# Altium PCB PCB2_0.PcbDoc
Units mm, origin at the board's own origin, x right, y up, seen from the top; angles counter-clockwise.
Board outline 110 x 69 mm, 2 copper layers (Top Layer, Bottom Layer); 64 components, 63 nets, 269 pads, 16 vias.
Unrouted connection lines stored in the file: 122.
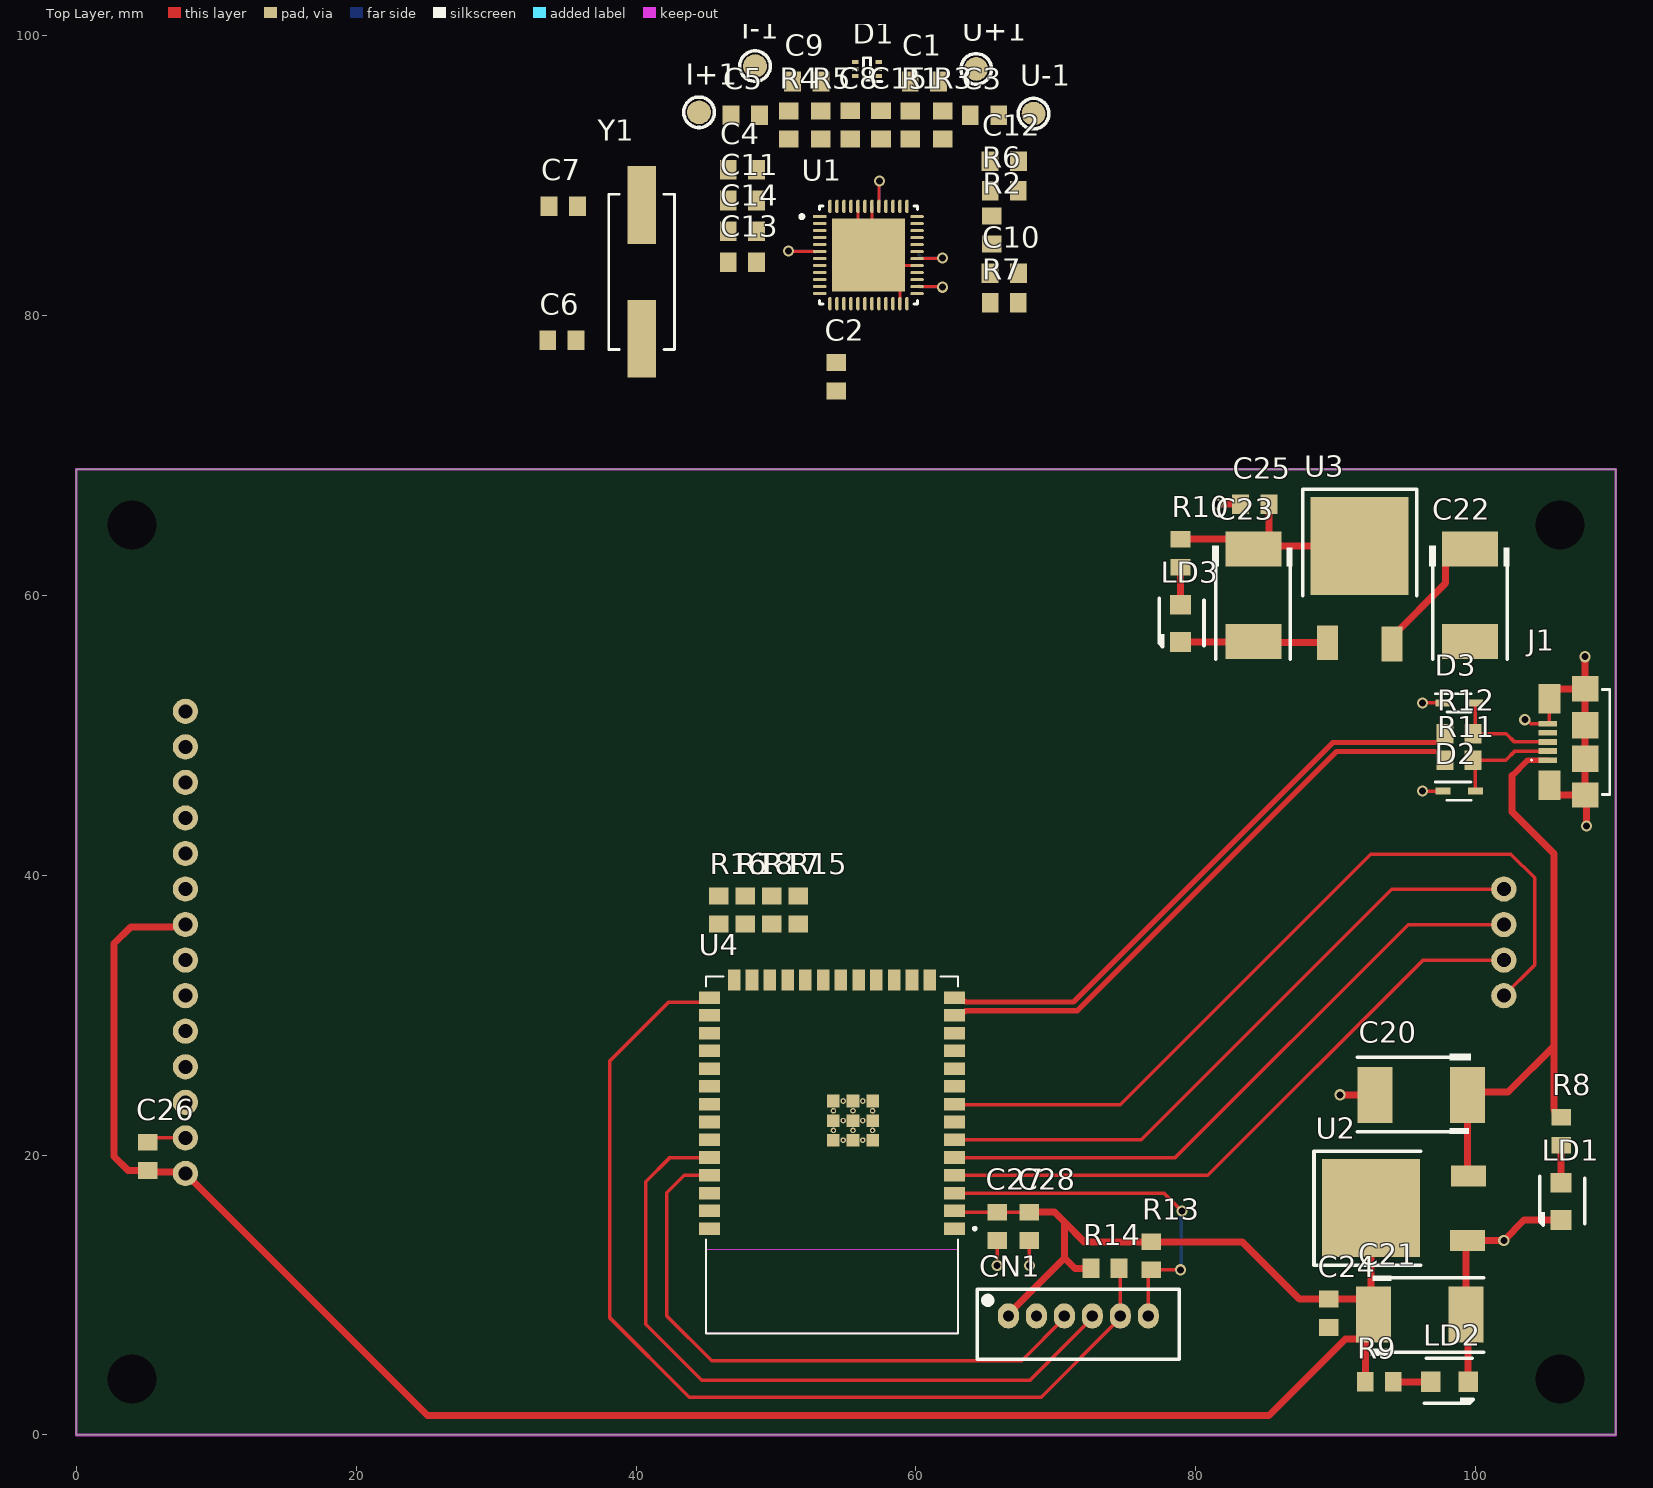
[diagram p0: Top Layer view]
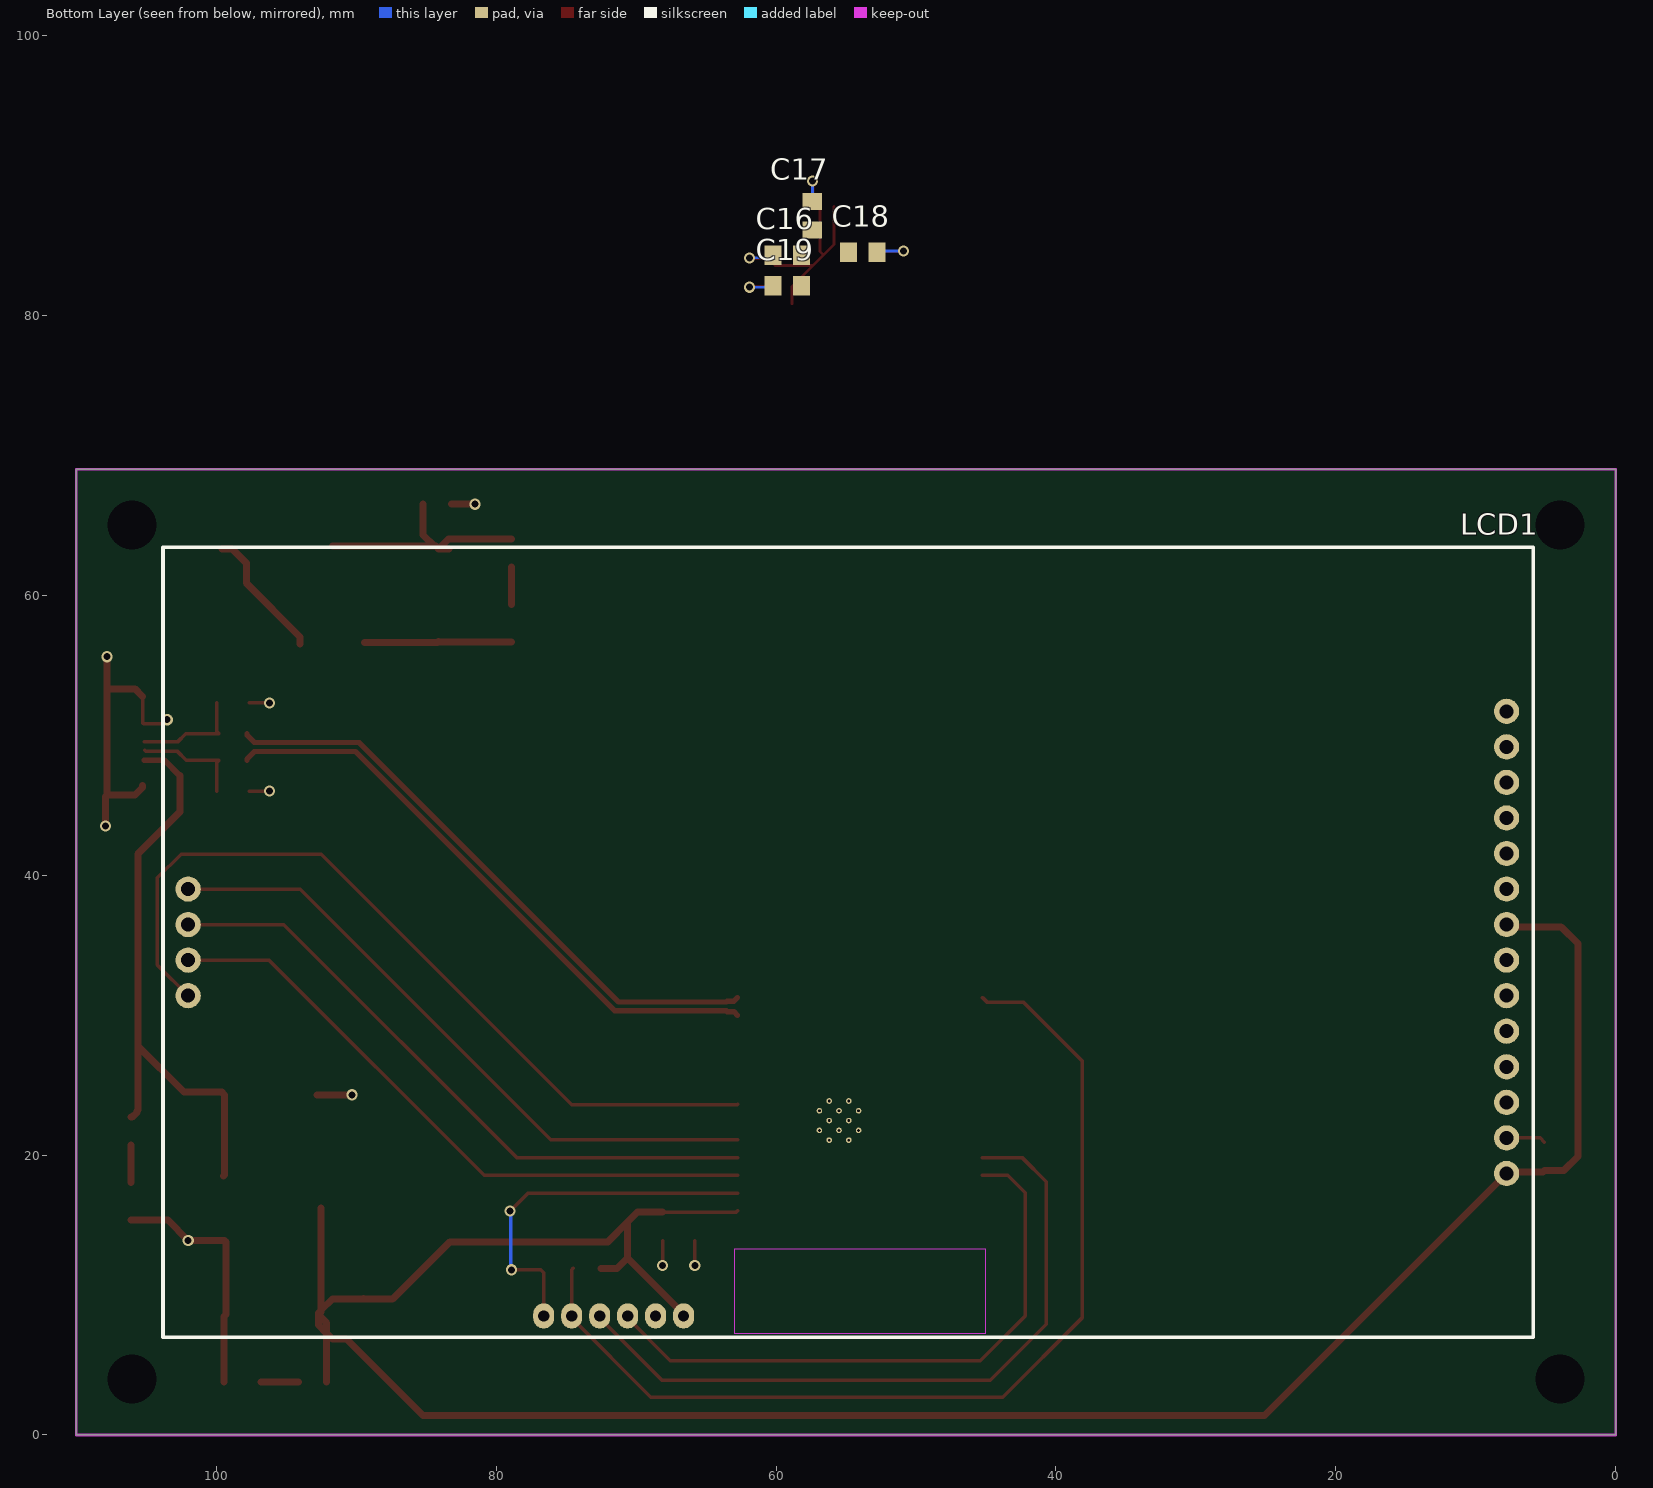
[diagram p1: Bottom Layer view, seen from below]

## Layer stack, top to bottom
Top Solder: solder mask 0.0102, Solder Resist, Dk 3.5
Top Layer: signal copper 0.0356
Dielectric 1: dielectric 0.32, FR-4, Dk 4.8
Bottom Layer: signal copper 0.0356
Bottom Solder: solder mask 0.0102, Solder Resist, Dk 3.5

## Board outline
0,0 0,69 110,69 110,0

## Design rules (kind name [scope] priority, off if disabled: settings)
Clearance Clearance_1 [OnMid vs OnMid] p1: gap=0.254 ignorepadtopadclearanceinfootprint=FALSE sourcerule=40 cellrowname=All cellrowtype=0 cellcolname=All cellcoltype=0 innerlayers=TRUE
Clearance Clearance_2 [(ExistsOnLayer('Top Layer') Or ExistsOnLayer('Bottom Layer')) vs (ExistsOnLayer('Top Layer') Or ExistsOnLayer('Bottom Layer'))] p2: gap=0.254 ignorepadtopadclearanceinfootprint=FALSE sourcerule=40 cellrowname=All cellrowtype=0 cellcolname=All cellcoltype=0 outerlayers=TRUE
Clearance [All] p3: gap=0.254 ignorepadtopadclearanceinfootprint=FALSE ismatrix=TRUE miname0="All Differential Pairs" mitype0=4
DiffPairsRouting [All] p1: maxlimit=0.254 minlimit=0.254 mostfreqgap=0.254 toplayer_minwidth=0.381 toplayer_maxwidth=0.381 toplayer_prefwidth=0.381 bottomlayer_minwidth=0.381 bottomlayer_maxwidth=0.381 bottomlayer_prefwidth=0.381 maxuncoupledlength=12.7
PolygonConnect [All] p1: connectstyle=Relief reliefconductorwidth=0.254 reliefentries=4 polygonreliefangle="90 Angle" airgapwidth=0.254
RoutingVias [All] p1: holewidth=0.5 width=0.8 viastyle="Through Hole" minholewidth=0.5 minwidth=0.8 maxholewidth=0.5 maxwidth=0.8
SolderMaskExpansion [All] p1: expansion=0.102 istentingtop=FALSE
SupplyNets "Schematic Supply Nets_4" [InNet('+5')] p1: voltage=0.000
SupplyNets "Schematic Supply Nets_3" [InNet('DVDD')] p2: voltage=0.000
SupplyNets "Schematic Supply Nets_1" [InNet('AVDD')] p3: voltage=0.000
SupplyNets "Schematic Supply Nets" [InNet('GND')] p4: voltage=0.000
Width [All] p1: maxlimit=1 minlimit=0.1 preferedwidth=0.254 minimp=50.000000 maximp=50.000000 favimp=50.000000
29 further rules are at their usual default settings.

## Classes and differential pairs
differential pair USB: +USB_P -USB_N

## Components (designator, comment, footprint, x,y, rotation, side; value= is the part's Value field where it differs from the comment)
C1 "CAP SMD CER 10UF 50V 1206" CAP0805OK 60.6,96.7 r0 top value=10uF
C2 "CAP SMD CER 470NF 100V 0805" CAP0805OK 54.3,75.6 r90 top value=470nF
C3 "CAP SMD CER 10UF 50V 1206" CAP0805OK 64.9,94.3 r0 top value=10uF
C4 "CAP SMD CER 470NF 100V 0805" CAP0805OK 47.6,90.4 r0 top value=470nF
C5 "CAP SMD CER 10UF 50V 1206" CAP0805OK 47.8,94.3 r180 top value=10uF
C6 "CAP SMD CER 6.8PF 25V 0805" CAP0805OK 34.7,78.2 r180 top value=6.8pF
C7 "CAP SMD CER 6.8PF 25V 0805" CAP0805OK 34.8,87.8 r180 top value=6.8pF
C8 "CAP SMD CER 4.7UF 50V 0805" CAP0805OK 55.3,93.6 r270 top value=4.7uF
C9 "CAP SMD CER 10UF 50V 1206" CAP0805OK 52.2,96.7 r180 top value=10uF
C10 "CAP SMD CER 470NF 100V 0805" CAP0805OK 66.3,83 r180 top value=470nF
C11 "CAP SMD CER 470NF 100V 0805" CAP0805OK 47.6,88.2 r0 top value=470nF
C12 "CAP SMD CER 100NF 25V 0805" CAP0805OK 66.3,91 r0 top value=100nF
C13 "CAP SMD CER 1UF 10V 0805" CAP0805OK 47.6,83.8 r0 top value=1uF
C14 "CAP SMD CER 100NF 25V 0805" CAP0805OK 47.6,86 r180 top value=100nF
C15 "CAP SMD CER 4.7NF 25V 0805" CAP0805OK 57.5,93.6 r90 top value=4.7nF
C16 "CAP SMD CER 100NF 25V 0805" CAP0805OK 59.2,84.3 r180 bottom value=100nF
C17 "CAP SMD CER 100NF 25V 0805" CAP0805OK 57.4,87.1 r270 bottom value=100nF
C18 "CAP SMD CER 100NF 25V 0805" CAP0805OK 53.8,84.5 r0 bottom value=100nF
C19 "CAP SMD CER 100NF 25V 0805" CAP0805OK 59.2,82.1 r180 bottom value=100nF
C20 "CAP SMD TAN 10UF 25V 2312" CAP2312 96.1,24.2 r180 top value=10uF
C21 "CAP SMD TAN 10UF 25V 2312" CAP2312 96,8.7 r0 top value=10uF
C22 "CAP SMD TAN 10UF 25V 2312" CAP2312 99.7,60 r270 top value=10uF
C23 "CAP SMD TAN 10UF 25V 2312" CAP2312 84.2,60 r270 top value=10uF
C24 "CAP SMD CER 100NF 25V 0805" CAP0805OK 89.5,8.7 r270 top value=100nF
C25 "CAP SMD CER 100NF 25V 0805" CAP0805OK 84.2,66.5 r180 top value=100nF
C26 "CAP SMD CER 100NF 25V 0805" CAP0805OK 5.1,19.9 r270 top value=100nF
C27 "CAP SMD CER 100NF 25V 0805" CAP0805OK 65.8,14.9 r270 top value=100nF
C28 "CAP SMD CER 100NF 25V 0805" CAP0805OK 68.1,14.9 r270 top value=100nF
CN1 "CN MAC 6 VIAS 180º 2.54MM" PHMC4-06 66.6,8.5 r0 top
D1 "SP3004-04XTG" SOTFL50P160X60-6N 56.5,97.6 r180 top
D2 "SD05C-7" SOD2513X120N 98.8,46 r0 top
D3 "SD05C-7" SOD2513X120N 98.8,52.3 r0 top
I+1 "I+" "TEST POINT" 44.5,94.5 r0 top
I-1 "I-" "TEST POINT" 48.5,97.8 r0 top
J1 "microUSB" microUSB 107.011,49.512 r90 top
LCD1 "Display 3,5\"" "Display_3.5\"_SPI_480X320" 103.9,7.005 r180 bottom
LD1 "PLCC-2" PLCC-2 106.1,16.7 r270 top
LD2 "PLCC-2" PLCC-2 98.1,3.8 r0 top
LD3 "PLCC-2" PLCC-2 78.9,58 r270 top
R1 "RES SMD 1K6 0.1% 0805" res0805ok 59.6,93.6 r90 top value=1K
R2 "RES SMD 1K 1% 0805" res0805ok 65.4,86.1 r270 top value=1K
R3 "RES SMD 1K6 0.1% 0805" res0805ok 61.9,93.6 r90 top value=1K
R4 "RES SMD 100R 1% 0805" res0805ok 50.9,93.6 r90 top value=100
R5 "RES SMD 100R 1% 0805" res0805ok 53.2,93.6 r90 top value=100
R6 "RES SMD 10M 5% 0805" res0805ok 66.3,88.9 r0 top value=10M
R7 "RES SMD 10M 5% 0805" res0805ok 66.3,80.9 r0 top value=10M
R8 "RES SMD 1K 1% 0805" res0805ok 106.1,21.7 r90 top value=470
R9 "RES SMD 1K 1% 0805" res0805ok 93.1,3.8 r180 top value=470
R10 "RES SMD 1K 1% 0805" res0805ok 78.9,63 r90 top value=470
R11 "RES SMD 100K 1% 0805" res0805ok 98.8,48.2 r180 top value=100K
R12 "RES SMD 100K 1% 0805" res0805ok 98.8,50.1 r180 top value=100K
R13 "RES SMD 10K 1% 0805" res0805ok 76.8,12.8 r90 top value=10K
R14 "RES SMD 10K 1% 0805" res0805ok 73.5,11.9 r180 top value=10K
R15 "RES SMD 10 1% 0805" res0805ok 51.6,37.5 r270 top value=10
R16 "RES SMD 10 1% 0805" res0805ok 45.9,37.5 r270 top value=10
R17 "RES SMD 10 1% 0805" res0805ok 49.7,37.5 r90 top value=10
R18 "RES SMD 10 1% 0805" res0805ok 47.8,37.5 r270 top value=10
U1 "AD5941BCPZ" FP-CP-48-4-IPC_A 56.6,84.3 r0 top
U2 "LM1117" TO252-3 92.5,16.2 r90 top
U3 "LM1117" TO252-3 91.7,63.5 r0 top
U4 "IC SMD ESP32-S3-WROOM-1-N4R2" XCVR_ESP32-S3-WROOM-1-N4R2 54,20 r180 top
U+1 "U+" "TEST POINT" 64.3,97.6 r0 top
U-1 "U-" "TEST POINT" 68.4,94.4 r0 top
Y1 "XTAL SMD 16MHZ" "XTAL SMD 16MHZ" 40.4,83.1 r270 top

## Footprints (in the part's own frame and the unit in brackets; to place one, negate y for a bottom-side part, rotate by r counter-clockwise, add the part's x,y. Pads: shape width x height; smd on the part's side, far side on the other; paste and mask are expansions set on the pad)
CAP0805OK [mm]
  rect 1.2x1.4 smd: 1(-1.016,0) 2(1.016,0)
  body extent -1.4,-0.62 1.4,0.62, height 0.8
CAP2312 [mm]
  rect 2.5x4 smd: 1(-3.3,-0.1) 2(3.3,-0.1)
  silkscreen extent -3.56,-3.05 4.57,2.7, body extent -3.8,-2.3 3.8,2.3, height 3.1
"Display_3.5\"_SPI_480X320" [mm]
  round 1.8 hole 1: 1(96.1,11.68) 2(96.1,14.22) 3(96.1,16.76) 4(96.1,19.3) 5(96.1,21.84) 6(96.1,24.38) 7(96.1,26.92) 8(96.1,29.46) 9(96.1,32) 10(96.1,34.54) 11(96.1,37.08) 12(96.1,39.62) 13(96.1,42.16) 14(96.1,44.7) 15(1.9,31.995) 16(1.9,29.455) 17(1.9,26.915) 18(1.9,24.375)
  silkscreen extent 0.1,-0.03 98,56.43, body extent 0,0 98,56.34, height 11.7
FP-CP-48-4-IPC_A [mm]
  rect 0.961x0.239 smd paste+0 mask+0: 1(-3.476,2.75)
  rrect100% 0.961x0.239 smd paste+0 mask+0: 2(-3.476,2.25) 3(-3.476,1.75) 4(-3.476,1.25) 5(-3.476,0.75) 6(-3.476,0.25) 7(-3.476,-0.25) 8(-3.476,-0.75) 9(-3.476,-1.25) 10(-3.476,-1.75) 11(-3.476,-2.25) 12(-3.476,-2.75) 25(3.476,-2.75) 26(3.476,-2.25) 27(3.476,-1.75) 28(3.476,-1.25) 29(3.476,-0.75) 30(3.476,-0.25) 31(3.476,0.25) 32(3.476,0.75) 33(3.476,1.25) 34(3.476,1.75) 35(3.476,2.25) 36(3.476,2.75)
  rrect100% 0.239x0.961 smd paste+0 mask+0: 13(-2.75,-3.476) 14(-2.25,-3.476) 15(-1.75,-3.476) 16(-1.25,-3.476) 17(-0.75,-3.476) 18(-0.25,-3.476) 19(0.25,-3.476) 20(0.75,-3.476) 21(1.25,-3.476) 22(1.75,-3.476) 23(2.25,-3.476) 24(2.75,-3.476) 37(2.75,3.476) 38(2.25,3.476) 39(1.75,3.476) 40(1.25,3.476) 41(0.75,3.476) 42(0.25,3.476) 43(-0.25,3.476) 44(-0.75,3.476) 45(-1.25,3.476) 46(-1.75,3.476) 47(-2.25,3.476) 48(-2.75,3.476)
  rect 5.2x5.2 smd paste-1000 mask+0: 49(0,0)
  silkscreen extent -4.88,-3.5 3.5,3.5, body extent -4.46,-4.46 4.46,4.46, height 0.25
microUSB [mm]
  rect 0.4x1.35 smd: 1(-1.3,1.875) 2(-0.65,1.875) 3(0,1.875) 4(0.65,1.875) 5(1.3,1.875)
  rect 2.1x1.6 smd: MP1(-3.1,1.75) MP2(3.1,1.75)
  rect 1.8x1.9 smd: MP3(-3.8,-0.8) MP6(3.8,-0.8)
  rect 1.9x1.9 smd: MP4(-1.2,-0.8) MP5(1.2,-0.8)
  silkscreen extent -3.75,-2.55 3.75,3.08, body extent -3.96,-2.55 3.96,2.55, height 2.77
PHMC4-06 [mm]
  oval 1.5x1.8 hole 0.8: 1(0,0) 2(2,0) 3(4,0) 4(6,0) 5(8,0) 6(10,0)
  silkscreen extent -2.21,-3.1 12.22,1.91, body extent -2,-2.93 12,1.72, height 6.02
PLCC-2 [mm]
  rect 1.4x1.5 smd: 1(-1.321,0) 2(1.346,0)
  silkscreen extent -1.78,-1.52 1.7,1.68, body extent -1.75,-1.43 1.75,1.53, height 1.75
res0805ok [mm]
  rect 1.2x1.4 smd: 1(-1,0) 2(1,0)
  body extent -1,-0.62 1,0.63, height 0.78
SOD2513X120N [mm]
  rect 1.075x0.5 smd: 1(-1.162,0) 2(1.162,0)
  silkscreen extent -1.7,-0.65 0.85,0.65, body extent -1.25,-0.65 1.25,0.65, height 1.2
SOTFL50P160X60-6N [mm]
  rect 0.475x0.3 smd: 1(-0.838,0.5) 2(-0.838,0) 3(-0.838,-0.5) 4(0.838,-0.5) 5(0.838,0) 6(0.838,0.5)
  silkscreen extent -1.07,-0.8 0.25,0.9, body extent -0.8,-0.8 0.8,0.8, height 0.6
"TEST POINT" [mm]
  round 1.7 smd: 0(0,0)
  silkscreen extent -1.09,-1.09 1.09,1.09
TO252-3 [mm]
  rect 1.5x2.5 smd: 1(-2.3,-6.9) 3(2.3,-6.985)
  rect 7x7 smd: 2(0,0)
  silkscreen extent -4.06,-3.56 4.06,4.06, body extent -3.29,-7.81 3.29,2.1, height 2.29
XCVR_ESP32-S3-WROOM-1-N4R2 [mm]
  rect 1.5x0.9 smd: 1(-8.75,5.26) 2(-8.75,3.99) 3(-8.75,2.72) 4(-8.75,1.45) 5(-8.75,0.18) 6(-8.75,-1.09) 7(-8.75,-2.36) 8(-8.75,-3.63) 9(-8.75,-4.9) 10(-8.75,-6.17) 11(-8.75,-7.44) 12(-8.75,-8.71) 13(-8.75,-9.98) 14(-8.75,-11.25) 27(8.75,-11.25) 28(8.75,-9.98) 29(8.75,-8.71) 30(8.75,-7.44) 31(8.75,-6.17) 32(8.75,-4.9) 33(8.75,-3.63) 34(8.75,-2.36) 35(8.75,-1.09) 36(8.75,0.18) 37(8.75,1.45) 38(8.75,2.72) 39(8.75,3.99) 40(8.75,5.26)
  rect 0.9x1.5 smd: 15(-6.985,-12.5) 16(-5.715,-12.5) 17(-4.445,-12.5) 18(-3.175,-12.5) 19(-1.905,-12.5) 20(-0.635,-12.5) 21(0.635,-12.5) 22(1.905,-12.5) 23(3.175,-12.5) 24(4.445,-12.5) 25(5.715,-12.5) 26(6.985,-12.5)
  rect 0.9x0.9 smd: 41_1(-1.5,-2.46) 41_2(-2.9,-2.46) 41_3(-0.1,-2.46) 41_4(-2.9,-3.86) 41_5(-1.5,-3.86) 41_6(-0.1,-3.86) 41_7(-2.9,-1.06) 41_8(-1.5,-1.06) 41_9(-0.1,-1.06)
  round 0.4 hole 0.2 mask+0: 41_10(-1.5,-1.76) 41_11(-2.9,-1.76) 41_12(-0.1,-1.76) 41_13(-2.9,-3.16) 41_14(-1.5,-3.16) 41_15(-0.1,-3.16) 41_16(-2.2,-1.06) 41_17(-0.8,-1.06) 41_18(-2.2,-2.46) 41_19(-0.8,-2.46) 41_20(-2.2,-3.86) 41_21(-0.8,-3.86)
  Keep-Out Layer region: 9,6.75 -9,6.75 -9,12.75 9,12.75
  Keep-Out Layer region: 9,6.75 -9,6.75 -9,12.75 9,12.75
  silkscreen extent -10.3,-12.75 9,12.75, body extent -9,-12.75 9,12.75, height 3.25
"XTAL SMD 16MHZ" [mm]
  rect 5.55x2.05 smd: 1(-4.775,0) 2(4.775,0)
  silkscreen extent -5.55,-2.35 5.55,2.35, body extent -7.34,-2.35 7.34,2.35, height 4.6

## Part data
C1 C3 C5 C9: library part "CAP SMD CER 10UF 10V 0805", "Multilayer Ceramic Capacitors MLCC - SMD/SMT 10 uF 10 VDC 10% 0805 X7R", Tolerance=20%, Voltage=50V, COD. CRISTOFOLI=EMP.00322, List="CAP CER 10UF 50V X5R 1206/UMK316BBJ106ML-T/Generic", Type=CERAMIC
C2 C4 C10 C11: Tolerance=10%, Voltage=100V, COD. CRISTOFOLI=EMP.00245, List="CAP CER 0.47UF 100V 10% X7R 0805/GRM21BR72A474KA73L/Murata Electronics North America", Type=CERAMIC
C6 C7 C15: library part "CAP SMD CER 100NF 25V 0805", Tolerance=10%, Voltage=25V, COD. CRISTOFOLI=EMP.00094, List="CAP CER 0.1UF 25V 10% X7R 0805/CGJ4J2X7R1E104K125AA/TDK", Type=CERAMIC
C8: Tolerance=10%, Voltage=50V, COD. CRISTOFOLI=EMP.00333, List="CAP CER 4.7UF 50V X5R 0805/CL21A475KBQNNNE/Samsung", Type=CERAMIC
C12 C14 C16 C17 C18 C19 C24 C25 C26 C27 C28: Tolerance=10%, Voltage=25V, COD. CRISTOFOLI=EMP.00094, List="CAP CER 0.1UF 25V 10% X7R 0805/CGJ4J2X7R1E104K125AA/TDK", Type=CERAMIC
C13: Tolerance=20%, Voltage=10V, COD. CRISTOFOLI=EMP.00209, List="CAP- SMD/SMT X7R 0805 10V 1uF 20%/LMK212BJ105MG-T/Taiyo Yuden", Type=CERAMIC
C20 C21 C22 C23: Tolerance=20%, Voltage=25V, COD. CRISTOFOLI=EMP.00040, List="CAP TANT 10UF 25V 20% 2312 / 293D106X0025C2TE3 / Vishay", Type=TANTALUM
CN1: "gravação micro", Manufacturer=METALTEX, Manufacturer Part Number=PHMC4-06, COD. CRISTOFOLI=EMP.00436, List="Barra de pinos Macho 180° / BPSC-03 / metaltex"
D1: "TVS Diode (Uni-directional)", Manufacturer_Name=LITTELFUSE, Mouser Part Number=576-SP3004-04XTG, Arrow Part Number=SP3004-04XTG, Arrow Price/Stock=https://www.arrow.com/en/products/sp3004-04xtg/littelfuse?region=nac, Datasheet Link=https://m.littelfuse.com/~/media/electronics/datasheets/tvs_diode_arrays/littelfuse_tvs_diode_array_sp3004_datasheet.pdf.pdf, Height=0.6mm, Manufacturer_Part_Number=SP3004-04XTG, Mouser Price/Stock=https://www.mouser.co.uk/ProductDetail/Littelfuse/SP3004-04XTG?qs=trbuaetfxXQ7JjseAkJ3Ww%3D%3D
D2 D3: "TVS Diode (Bi-directional)", Manufacturer_Name="Diodes Incorporated", Mouser Part Number=621-SD05C-7, Arrow Part Number=SD05C-7, Arrow Price/Stock=https://www.arrow.com/en/products/sd05c-7/diodes-incorporated?utm_currency=USD&region=nac, Datasheet Link=https://www.diodes.com//assets/Datasheets/SD05C.pdf, Height=1.2mm, Manufacturer_Part_Number=SD05C-7, Mouser Price/Stock=https://www.mouser.co.uk/ProductDetail/Diodes-Incorporated/SD05C-7?qs=lQAVKuKFhkJ%252Bbajm903DcQ%3D%3D
I+1 I-1 U+1 U-1: library part "TEST POINT"
J1: "Connector", Arrow Part Number=10118192-0002LF, Manufacturer_Name="Amphenol Communications Solutions", Arrow Price/Stock=https://www.arrow.com/en/products/10118192-0002lf/amphenol-fci?utm_currency=USD&region=nac, Datasheet Link=https://cdn.amphenol-cs.com/media/wysiwyg/files/drawing/10118192.pdf, Height=3.08mm, Manufacturer_Part_Number=10118192-0002LF
LCD1: library part "Display 3,5\" SPI", "Display TFT SPI 480X320", COD. CRISTOFOLI=EMP.00435, Datasheet=http://www.lcdwiki.com/res/MSP3520/3.5inch_SPI_Module_MSP3520_User_Manual_EN.pdf, Documentações=http://www.lcdwiki.com/3.5inch_SPI_Module_ILI9488_SKU:MSP3520, List="Display TFT 3.5\" SPI 480X320 MSP3520"
LD1 LD2 LD3: library part "LED branco /67-21S/KK5C-H6565N32P02833Z6/2T(EMM)/Everlight", COD. CRISTOFOLI=EMP.00388, List="LED branco /67-21S/KK5C-H6565N32P02833Z6/2T(EMM)/Everlight"
R1 R2 R3: Tolerance=0.1%
  R1 R3: COD. CRISTOFOLI=EMP.00204, List="RES 1.6K OHM 1/8W .1% 0805 SMD/ERA-6AEB162V/Panasonic Electronic Components/Generic"
  R2: COD. CRISTOFOLI=EMP.50098, List="RES SMD 1K 1% 0805"
R4 R5 R6 R7: library part "RES SMD 10R 1% 0805", Tolerance=1%, COD. CRISTOFOLI=EMP.50001, List="RES SMD 10R 1% 0805"
R8 R9 R10 R13 R14: Tolerance=1%
  R8 R9 R10: COD. CRISTOFOLI=EMP.50098, List="RES SMD 1K 1% 0805"
  R13 R14: COD. CRISTOFOLI=EMP.50116, List="RES SMD 10K 1% 0805"
R11 R12 R15 R16 R17 R18: library part "RES SMD 10K 1% 0805", Tolerance=1%, COD. CRISTOFOLI=EMP.50116, List="RES SMD 10K 1% 0805"
U1: library part CMP-09085-000021-2, "BIO-IMPEDANCE & ELECTROCHEMICAL", RoHS Compliant=Yes
U2 U3: library part "IC SMD REG LM1117 TO252", "800mA Low-Dropout Linear Regulator", Manufacturer="Texas Instruments", Voltage="1.8 A 5V", COD. CRISTOFOLI=EMP.50030, List="IC SMD REG LM1117 TO252"
U4: "Bluetooth, WiFi 802.11b/g/n, Bluetooth v5.0 Transceiver Module 2.4GHz PCB Trace Surface Mount", Package=None, Availability="In Stock", Check_prices=https://www.snapeda.com/parts/ESP32-S3-WROOM-1-N4R2/Espressif+Systems/view-part/?ref=eda, COD. CRISTOFOLI=EMP.50161, List="IC SMD ESP32-S3-WROOM-1-N4R2", MF="Espressif Systems", MP=ESP32-S3-WROOM-1-N4R2, Price=None, Purchase-URL=https://pricing.snapeda.com/search/part/ESP32-S3-WROOM-1-N4R2/?ref=eda, SnapEDA_Link=https://www.snapeda.com/parts/ESP32-S3-WROOM-1-N4R2/Espressif+Systems/view-part/?ref=snap
Y1: "Crystal or Oscillator", Arrow Part Number=XT9M20ANA16M, Manufacturer_Name=Vishay, Mouser Part Number=73-XT49M1600-20, Arrow Price/Stock=https://www.arrow.com/en/products/xt9m20ana16m/vishay?region=nac, Datasheet Link=https://componentsearchengine.com/Datasheets/5/XT9M20ANA16M.pdf, Height=4.5mm, Manufacturer_Part_Number=XT9M20ANA16M, Mouser Price/Stock=https://www.mouser.co.uk/ProductDetail/Vishay-Dale/XT9M20ANA16M?qs=NVJATC80C4%252B3oEpMmPFr7g%3D%3D

## Free pads (board coordinates)
  round 0 hole 3.5: 1(4,4) 1(4,65) 1(106,4) 1(106,65)

## Via types
v1: diameter 0.8, hole 0.5, Top Layer to Bottom Layer, 16 vias

## Nets (pads, with @x,y where several pads share a name; then routed paths per layer and width w, separated by ;. In a path a pad name is that pad's centre, name@x,y a point inside that pad or via, vN(x,y) a via of type N, cw(c..) or ccw(c..) an arc to the next point about the centre after c; other vN are vias at no path point)
+5: C20.1 C22.1 J1.1 R8.2 U2.3 U3.3 | length 51.9
  Top Layer w0.4: 102.6,47.1 103.712,48.212 J1.1
  Top Layer w0.5: U3.3 94,57.015 97.85,60.865 97.85,62.3 98.85,63.3 C22.1 ; U2.3 99.4,18.585 C20.1 99.6,24.5 102.3,24.5 105.6,27.8 ; 102.6,47.1 102.6,44.5 105.6,41.5 105.6,27.8 ; R8.2 106,22.7 105.65,23.05 105.65,23.15 105.6,23.2 105.6,27.8
AD_CS: R16.1 U1.15
AD_GP0: U1.19 U4.20
AD_GP1: U1.20 U4.19
AD_GP2: U1.21 U4.18
AD_MISO: R15.1 U1.18
AD_MOSI: R17.1 U1.17
AD_RESET_N: U1.22 U4.17
AD_SCLK: R18.1 U1.16
AFE2: R6.1 U1.35
AFE3: R7.1 U1.27
AIN0: R1.1 U1.39
AIN1: R3.1 U1.38
AIN3: C12.1 U1.36
AIN4: C15.1 U1.40
AVDD: C16.1 C17.1 C23.1 C25.1 D1.5 R10.2 U1.30 U1.41 U3.2 | length 24.2
  Top Layer w0.2: U1.41 57.358,87.783 57.358,89.558 v1(57.4,89.6) ; U1.30 60.083,84.058 61.858,84.058 v1(61.9,84.1)
  Top Layer w0.5: R10.2 83.4,64 C23.1 ; C23.1@83.35,63.3 C23.1 ; C25.1 85.216,64.3 C23.1@84.416,63.5 ; U3.2 C23.1@84.416,63.5 ; C23.1 84.3,63.5 C23.1@84.416,63.5
  Bottom Layer w0.2: C17.1 v1(57.4,89.6) ; C16.1 60.416,84.1 v1(61.9,84.1)
AVDD_REG: C11.2 U1.5
BIAS_U+: C1.1 R1.2 R6.2
BIAS_U-: C3.1 R3.2 R7.2
CE0: R4.1 U1.47
DE0: R5.1 U1.46
DVDD: C18.1 C19.1 C21.1 C24.1 C26.2 C27.1 C28.1 CN1.1 LCD1.1 LCD1.8 R9.2 R13.2 R14.2 U1.6 U1.26 U2.2 U4.2 | length 188.7
  Top Layer w0.2: v1(50.9,84.6) 50.942,84.558 53.117,84.558 U1.6 ; U1.26 61.849,82.051 v1(61.9,82)
  Top Layer w0.254: C26.2 5.199,18.785 5.299,18.685 LCD1.1 ; U4.2 62.844,15.916 C27.1 C28.1
  Top Layer w0.5: C26.2 3.716,18.884 2.7,19.9 2.7,35.1 3.9,36.3 7.635,36.3 LCD1.8 ; C26.2@5.199,18.785 7.7,18.785 LCD1.1 25.085,1.4 85.229,1.4 90.679,6.85 91.7,6.85 C21.1@92.1,7.25 ; CN1.1 66.6,8.65 70.6,12.65 ; C28.1 69.884,15.916 70.6,15.2 ; R14.2 71.35,11.9 70.6,12.65 ; C24.1@89.458,9.758 C24.1 ; R9.2 C21.1@92.1,7.25 ; U2.2 C21.1@92.5,8.916 ; C21.1@92.7,8.716 C21.1@92.5,8.916 ; 70.6,12.65 70.6,15.2 ; 70.6,15.2 72,13.8 R13.2 83.3,13.8 87.384,9.716 C24.1 ; C24.1 91.7,9.716 C21.1@92.5,8.916 ; C21.1@92.1,7.25 92.7,7.85 C21.1 ; C21.1@92.1,7.25 92.1,8 C21.1 ; C21.1@92.5,8.916 92.5,8.8 C21.1
  Bottom Layer w0.2: v1(50.9,84.6) 52.684,84.6 C18.1 ; C19.1 60.316,82 v1(61.9,82)
DVDD_REG1V8: C2.2 U1.14
EN: CN1.6 R13.1 U4.3 | length 26.5
  Top Layer w0.254: U4.3 77.72,17.28 v1(79,16) ; CN1.6 76.6,11.6 R13.1 v1(78.9,11.8)
  Bottom Layer w0.254: v1(78.9,11.8) 78.95,11.85 78.95,15.95 v1(79,16)
GND: C2.1 C4.1 C6.2 C7.2 C8.1 C10.1 C11.1 C12.2 C13.1 C14.2 C15.2 C16.2 C17.2 C18.2 C19.2 C20.2 C21.2 C22.2 C23.2 C24.2 C25.2 C26.1 C27.2 C28.2 CN1.2 D1.2 D2.1 D3.1 J1.5 J1.MP1 J1.MP2 J1.MP3 J1.MP4 J1.MP5 J1.MP6 LCD1.2 LD1.2 LD2.2 LD3.2 U1.13 U1.23 U1.25 U1.29 U1.42 U1.44 U1.49 U2.1 U3.1 U4.1 U4.40 U4.41_1 U4.41_2 U4.41_3 U4.41_4 U4.41_5 U4.41_6 U4.41_7 U4.41_8 U4.41_9 | length 77.5
  Top Layer w0.2: U1.44 55.85,85.05 U1.49 ; U1.42 56.85,84.55 U1.49 ; U1.23 58.85,82.05 U1.49@57.35,83.55 ; U1.29 U1.49@57.35,83.55 ; U1.49 U1.49@57.35,83.55
  Top Layer w0.254: C26.1 5.409,21.225 LCD1.2 ; v1(65.8,12.1) C27.2 ; v1(68.1,12.1) C28.2 ; v1(96.2,46) D2.1 ; v1(96.2,52.3) D3.1 ; v1(103.5,51.1) 103.648,51.1 103.936,50.812 J1.5 105.188,50.812 105.261,50.885 J1.MP2
  Top Layer w0.5: LD3.2 84.054,56.654 C23.2 84.2,56.6 U3.1 ; v1(81.5,66.5) C25.2 ; v1(90.3,24.3) C20.2 ; LD2.2 99.446,8.454 C21.2 99.3,13.8 U2.1 v1(102,13.9) 103.454,15.354 LD1.2 ; J1.MP1 105.261,46.262 105.811,45.712 J1.MP3 ; J1.MP2@105.261,52.762 105.811,53.312 J1.MP6 ; v1(107.8,55.6) 107.8,53.323 J1.MP6 ; v1(107.9,43.5) 107.9,45.623 J1.MP3 ; J1.MP3 J1.MP4 J1.MP5 J1.MP6
I+: C5.2 D1.4 I+1.0
I-: C9.2 D1.6 I-1.0
IO0: CN1.5 R14.1 U4.27 | length 72.1
  Top Layer w0.254: U4.27 44.927,30.927 42.327,30.927 38.105,26.705 38.105,8.395 43.8,2.7 68.95,2.7 74.6,8.35 CN1.5 74.6,11.8 R14.1
LCD_CLK: LCD1.7 LCD1.10 LCD1.15 U4.6 | length 46.7
  Top Layer w0.254: U4.6 76.09,21.09 94,39 LCD1.15
LCD_CS: LCD1.3 U4.39
LCD_MISO: LCD1.9 LCD1.13 LCD1.16 U4.5 | length 46.1
  Top Layer w0.254: U4.5 78.52,19.82 95.16,36.46 LCD1.16
LCD_MOSI: LCD1.6 LCD1.12 LCD1.17 U4.4 | length 45.6
  Top Layer w0.254: U4.4 80.85,18.55 96.22,33.92 LCD1.17
LCD_RESET: LCD1.4 U4.38
LCD_RS: LCD1.5 U4.15
NetC5_1: C5.1 R4.2
NetC9_1: C9.1 R5.2
NetD2_2: D2.2 J1.2 R11.1 | length 7.9
  Top Layer w0.254: D2.2 99.962,48.038 R11.1 102.134,48.2 102.796,48.862 105.031,48.862 J1.2@105.1,48.931
NetD3_2: D3.2 J1.3 R12.1 | length 7.8
  Top Layer w0.254: D3.2 99.962,50.262 R12.1 102.171,50.1 102.759,49.512 J1.3
NetLD1_1: LD1.1 R8.1 | length 2.7
  Top Layer w0.5: LD1.1 R8.1
NetLD2_1: LD2.1 R9.1 | length 2.7
  Top Layer w0.5: R9.1 LD2.1
NetLD3_1: LD3.1 R10.1 | length 2.7
  Top Layer w0.5: LD3.1 R10.1
NetR15_2: R15.2 U4.23
NetR16_2: R16.2 U4.26
NetR17_2: R17.2 U4.24
NetR18_2: R18.2 U4.25
RCAL0: R2.2 U1.32
RCAL1: R2.1 U1.33
RXD0: CN1.3 U4.37 | length 43.5
  Top Layer w0.254: U4.37 43.45,18.55 42.2,17.3 42.2,8.5 45.4,5.3 67.55,5.3 70.6,8.35 CN1.3
SD_CS: LCD1.18 U4.8 | length 58.9
  Top Layer w0.254: U4.8 62.78,23.6 74.6,23.6 92.5,41.5 102.5,41.5 104.2,39.8 104.2,33.58 LCD1.18
TCH_CS: LCD1.11 U4.7
TCH_IRQ: LCD1.14 U4.12
TXD0: CN1.4 U4.36 | length 51
  Top Layer w0.254: U4.36 42.42,19.82 40.7,18.1 40.7,7.9 44.7,3.9 68.15,3.9 72.6,8.35 CN1.4
U+: C1.2 D1.1 U+1.0
U-: C3.2 D1.3 U-1.0
USB_N: R11.2 U4.13 | length 43.2
  Top Layer w0.381: U4.13 63.01,30.24 63.475,30.24 63.533,30.298 71.511,30.298 90.046,48.833 97.267,48.833 97.8,48.3 R11.2
USB_P: R12.2 U4.14 | length 43.2
  Top Layer w0.381: U4.14 63.01,30.99 63.475,30.99 63.533,30.933 71.248,30.933 89.783,49.468 97.267,49.468 97.8,50 R12.2
VBIAS: C14.1 U1.8
VBIAS_CAP: C10.2 U1.31
VREF_1V8: C8.2 U1.43
VREF_2V5: C4.2 U1.4
VZERO: C13.2 U1.9
XTAL0: C6.1 U1.12 Y1.2
XTAL1: C7.1 U1.11 Y1.1
pads on no net: J1.4 U1.1 U1.2 U1.3 U1.7 U1.10 U1.24 U1.28 U1.34 U1.37 U1.45 U1.48 U4.9 U4.10 U4.11 U4.16 U4.21 U4.22 U4.28 U4.29 U4.30 U4.31 U4.32 U4.33 U4.34 U4.35 U4.41_10 U4.41_11 U4.41_12 U4.41_13 U4.41_14 U4.41_15 U4.41_16 U4.41_17 U4.41_18 U4.41_19 U4.41_20 U4.41_21

## Keep-outs
Keep-Out Layer:
  the board outline again, w0.2

## Text inside footprints (layer, text, board x,y; h text height)
U4: Mechanical 13 "ANTENNA" at 58.5,10.5 h1.27 r180